# Altium PCB BIMUDB-EHDW-01.PcbDoc
Units mil, origin at the board's own origin, x right, y up, seen from the top; angles counter-clockwise.
Board outline 6000 x 4000 mil, 2 copper layers (Top Layer, Bottom Layer), stack 64.8 mil thick; 47 components, 24 nets, 132 pads, 18 vias.
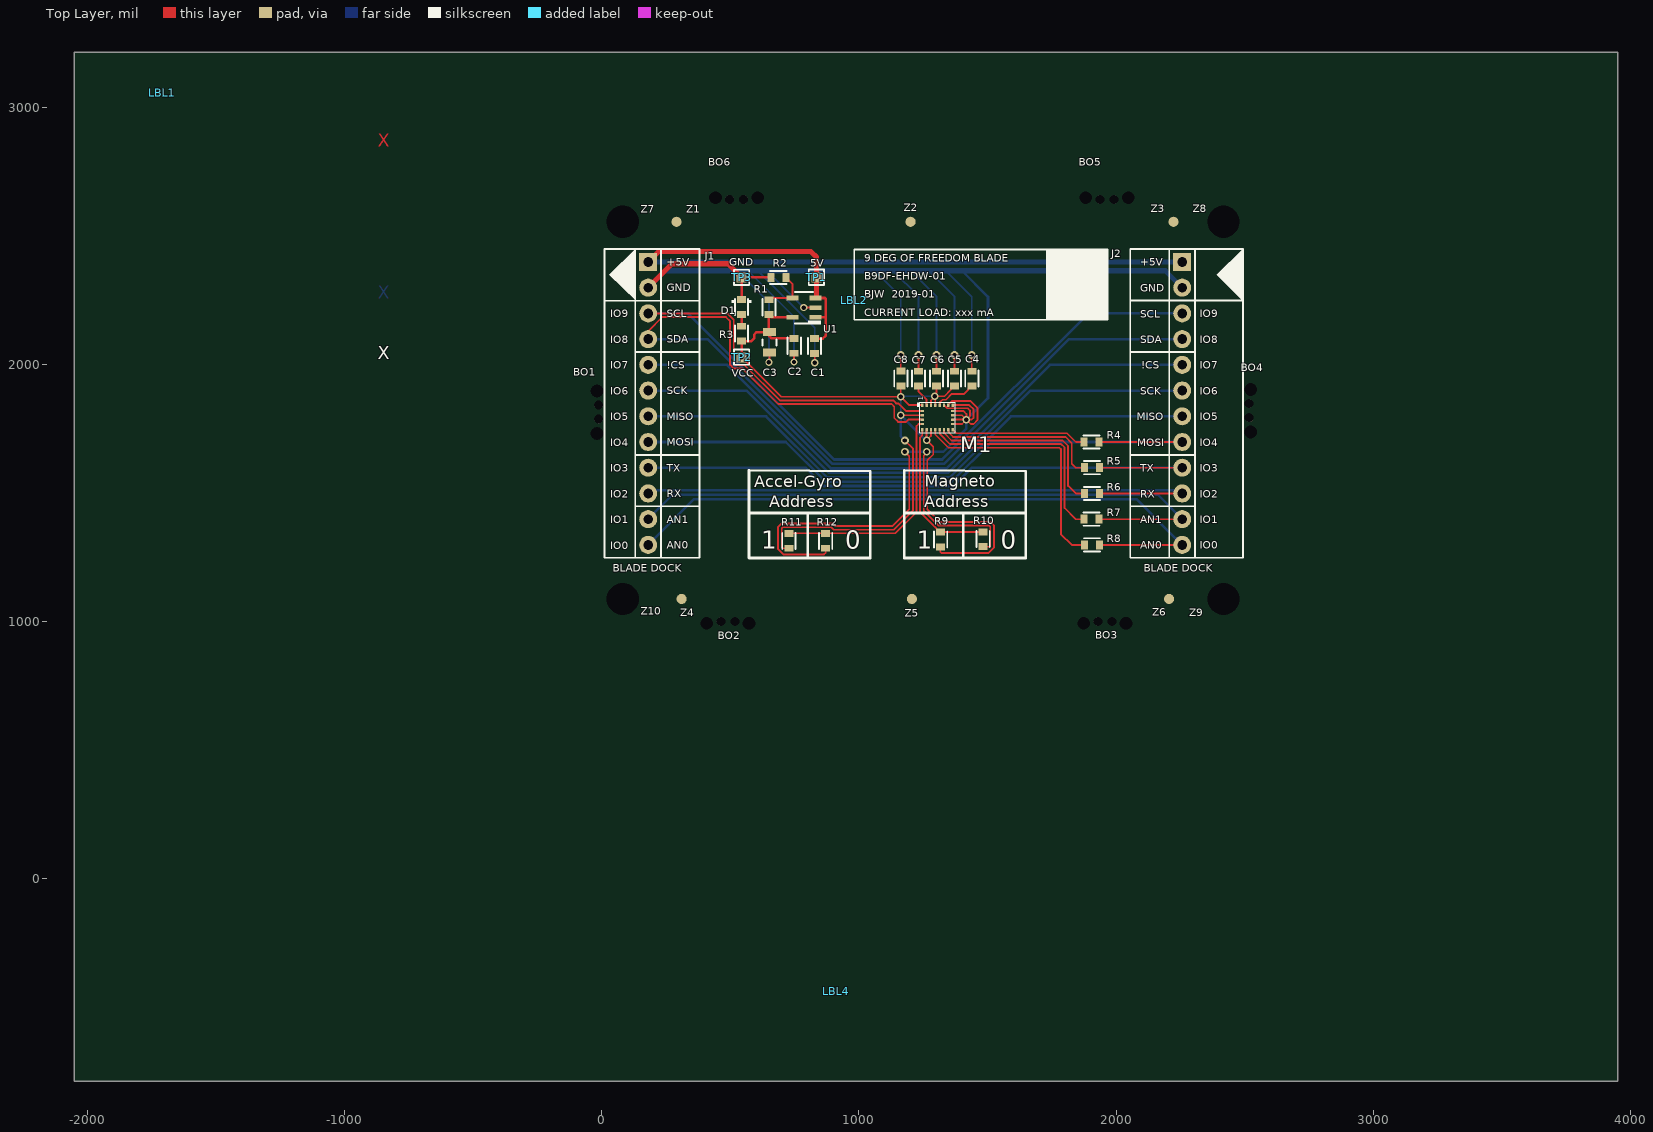
[diagram p0: Top Layer view]
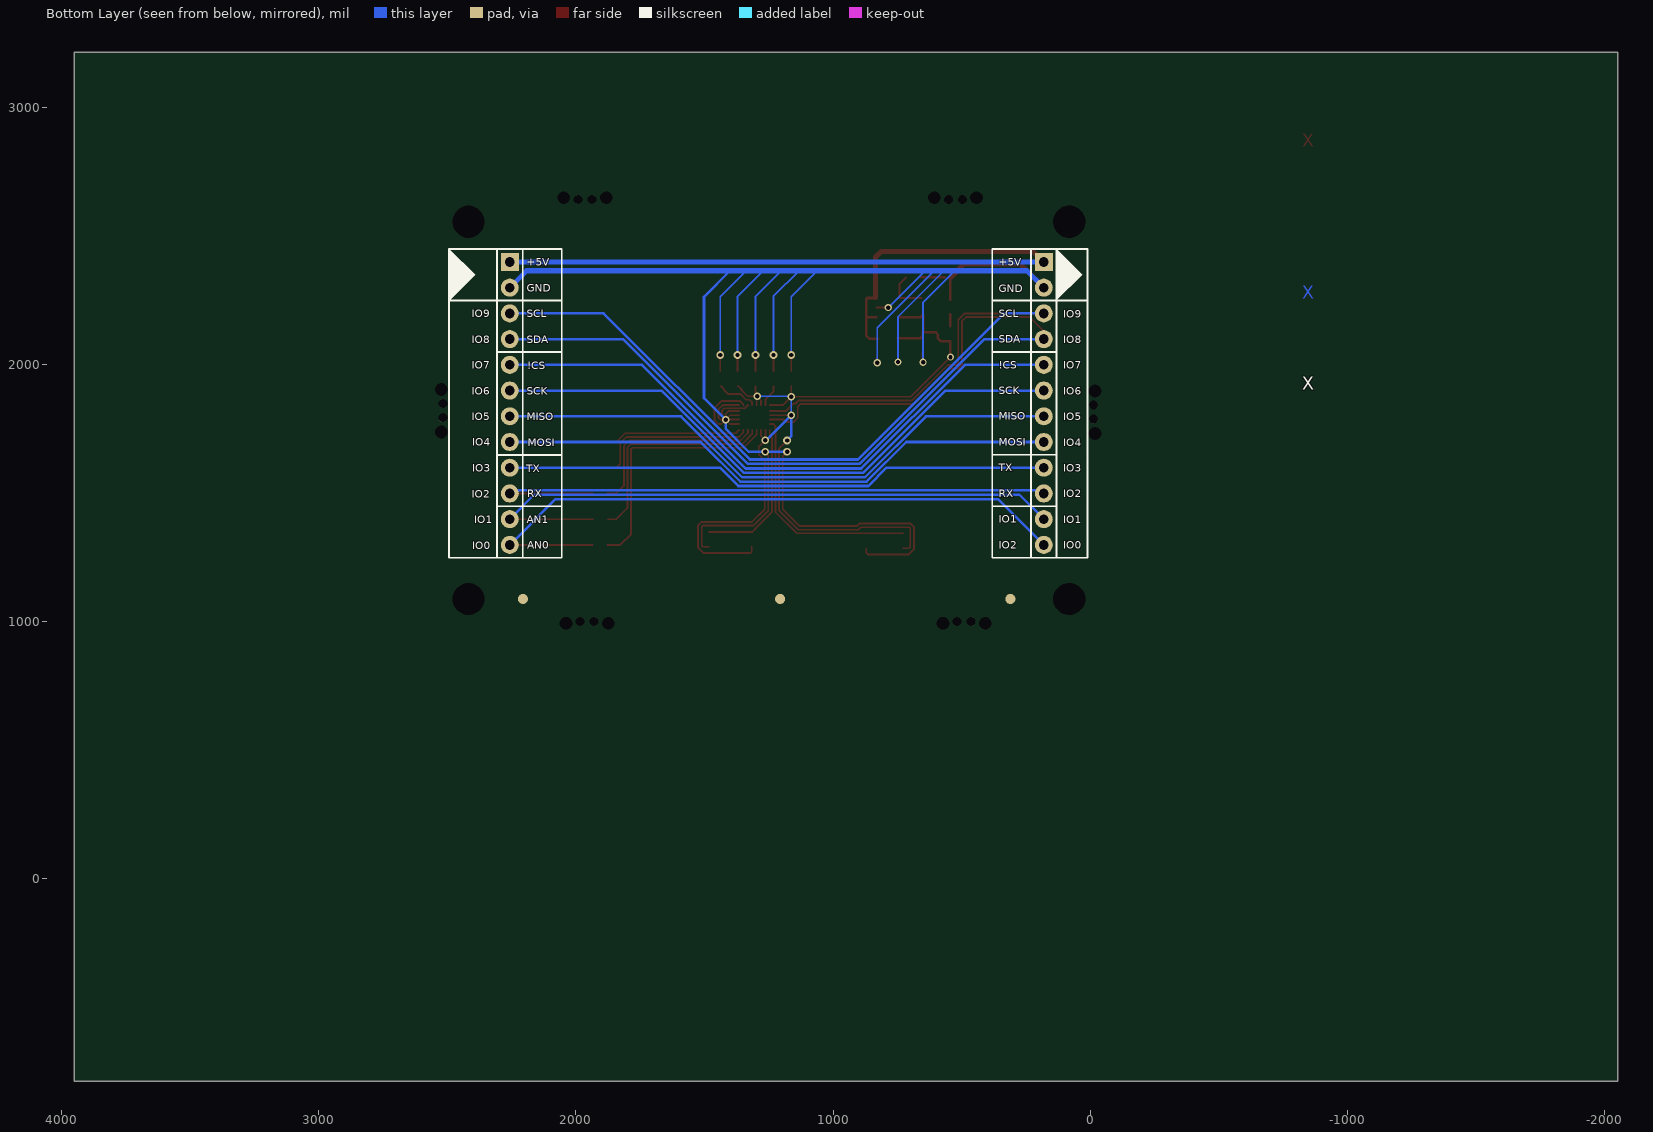
[diagram p1: Bottom Layer view, seen from below]

## Layer stack, top to bottom
Top Solder: solder mask 0.4, Solder Resist, Dk 3.5
Top Layer: signal copper 1.4
Dielectric1: core 62, FR-4, Dk 4.8
Bottom Layer: signal copper 1.4
Bottom Solder: solder mask 0.4, Solder Resist, Dk 3.5

## Board outline
-2050,-787 3950,-787 3950,3213 -2050,3213

## Design rules (kind name [scope] priority, off if disabled: settings)
Clearance "Clearance Polygon" [InPolygon] p1: gap=12 ignorepadtopadclearanceinfootprint=FALSE except(0: Arc-Hole Track-Hole SMDPad-Hole THPad-Hole Via-Hole Fill-Hole Poly-Hole Region-Hole Text-Hole)
Clearance [All] p2: gap=7 ignorepadtopadclearanceinfootprint=FALSE except(0: Arc-Hole Track-Hole SMDPad-Hole THPad-Hole Via-Hole Fill-Hole Poly-Hole Region-Hole Text-Hole)
FabricationTestPointUsage TestPointUsage [All] p1: valid=0 allowmultiple=FALSE
FabricationTestpoint Testpoint [All] p1: side=3 testpointundercomponent=TRUE minsize=40 maxsize=100 preferedsize=60 minholesize=0 maxholesize=40 preferedholesize=32 testpointgrid=1 allowsidetop=TRUE allowsidebottom=TRUE usegrid=TRUE gridtolerance=0.01
PolygonConnect "PolygonConnect Via" [All vs IsVia] p1: connectstyle=Direct reliefconductorwidth=10 reliefentries=4 polygonreliefangle="90 Angle" airgapwidth=10
PolygonConnect [All] p2: connectstyle=Relief reliefconductorwidth=10 reliefentries=4 polygonreliefangle="90 Angle" airgapwidth=10
RoomDefinition Sheet1 [InComponentClass('Sheet1')] p1: confinementstyle=ConfineIn formatcopy=TRUE lockcomponents=FALSE outline 3995,-732 6667,-732 6667,-484 3995,-484
RoomDefinition BIMUDB-EHDW-01 [InComponentClass('BIMUDB-EHDW-01')] p2: confinementstyle=ConfineIn formatcopy=TRUE lockcomponents=FALSE outline -3050,-1787 -1050,-1787 -1050,-787 -3050,-787
RoutingVias [All] p1: holewidth=28 width=50 viastyle="Through Hole" minholewidth=28 minwidth=50 maxholewidth=28 maxwidth=50
SilkToSolderMaskClearance SilkscreenOverComponentPads [IsPad] p1: minsilkscreentomaskgap=10 clearancetoexposedcopper=TRUE
SolderMaskExpansion [All] p1: expansion=4
Width [All] p1: maxlimit=200 minlimit=5 preferedwidth=10 toplayer_prefwidth=7 minimp=50.000000 maximp=50.000000 favimp=50.000000
27 further rules are at their usual default settings.

## Classes and differential pairs
component class Sheet1: C1 C2 C3 C4 C5 C6 C7 C8 D1 J1 J2 M1 R1 R2 R3 R4 R5 R6 R7 R8 R9 R10 R11 R12 TP1 TP2 TP3 U1
component class BIMUDB-EHDW-01: BO1 BO2 BO3 BO4 BO5 BO6 LBL1 LBL2 LBL4 Z1 Z2 Z3 Z4 Z5 Z6 Z7 Z8 Z9 Z10

## Components (designator, comment, footprint, x,y, rotation, side; value= is the part's Value field where it differs from the comment)
BO1 "BREAKOUT TAB" "BREAKOUT 4-HOLE 4MM" -12,1814 r270 top
BO2 "BREAKOUT TAB" "BREAKOUT 4-HOLE 4MM" 491,1000 r0 top
BO3 "BREAKOUT TAB" "BREAKOUT 4-HOLE 4MM" 1956.5,1000 r0 top
BO4 "BREAKOUT TAB" "BREAKOUT 4-HOLE 4MM" 2517,1820 r90 top
BO5 "BREAKOUT TAB" "BREAKOUT 4-HOLE 4MM" 1964.5,2641 r180 top
BO6 "BREAKOUT TAB" "BREAKOUT 4-HOLE 4MM" 524.5,2641 r180 top
C1 "1uF" 0603 827.6,2070.99 r270 top
C2 "1uF" 0603 748.6,2071.99 r270 top
C3 "10uF 0805 10V" 0805 652.21,2085.99 r270 top
C4 "10nF" 0603 1439,1944 r90 top
C5 "100nF" 0603 1372,1944 r90 top
C6 "10uF" 0603 1302,1944 r90 top
C7 "100nF" 0603 1232,1944 r90 top
C8 "100nF" 0603 1163,1945 r90 top
D1 "GREEN SMT" "0603 AK" 544,2223 r90 top
J1 "BLADE Child" "HDR1X12 ENGENUICS CHILD" 181,2398 r0 top
J2 "BLADE Parent" "HDR1X12 ENGENUICS PARENT" 2257,2398 r0 top
LBL1 "Active Layer Guide" "LABEL PCB ACTIVE LAYERS VERTICAL" -1708,3056 r0 top
LBL2 "PCB REV" "LABEL PCB REVISION BLADE" 982,2250 r0 top
LBL4 "PCB TITLE BLOCK" "LABEL PCB Title Block" 913,-438 r0 top
M1 "LSM9DS1 MCU" LSM9DS3 1305.75,1793.39 r0 top
R1 "698k" 0603 650.21,2221.99 r270 top
R2 "100k" 0603 687.06,2338 r180 top
R3 "1.2k" 0603 544,2119 r270 top
R4 "0R" 0603 1905,1698 r0 top
R5 "0R" 0603 1906,1598 r0 top
R6 "0R" 0603 1906,1498 r0 top
R7 "0R" 0603 1905,1398 r0 top
R8 "0R" 0603 1906,1298 r0 top
R9 "0R" 0603 1318,1319 r270 top
R10 "0R" 0603 1483,1320 r90 top
R11 "0R" 0603 728,1314 r90 top
R12 "0R" 0603 871,1314 r90 top
TP1 "5V" "TEST POINT SMT" 835.01,2338.4 r0 top
TP2 "VCC" "TEST POINT SMT" 544,2028 r180 top
TP3 "GND" "TEST POINT SMT" 544,2338 r180 top
U1 "MCP1824" SOT23-5 786.6,2219.99 r90 top
Z1 "PCB" "FIDUCIAL PCB" 291,2554 r0 top
Z2 "PCB" "FIDUCIAL PCB" 1201,2554 r0 top
Z3 "PCB" "FIDUCIAL PCB" 2223,2554 r0 top
Z4 "Panel" "FIDUCIAL PANEL" 311,1088 r0 top
Z5 "Panel" "FIDUCIAL PANEL" 1206,1088 r0 top
Z6 "Panel" "FIDUCIAL PANEL" 2206,1088 r0 top
Z7 "LABEL PANEL TOOL HOLE" "TOOLING HOLE 125MIL" 82,2554 r0 top
Z8 "LABEL PANEL TOOL HOLE" "TOOLING HOLE 125MIL" 2418,2554 r0 top
Z9 "LABEL PANEL TOOL HOLE" "TOOLING HOLE 125MIL" 2418,1088 r0 top
Z10 "LABEL PANEL TOOL HOLE" "TOOLING HOLE 125MIL" 82,1088 r0 top

## Footprints (in the part's own frame and the unit in brackets; to place one, negate y for a bottom-side part, rotate by r counter-clockwise, add the part's x,y. Pads: shape width x height; smd on the part's side, far side on the other; paste and mask are expansions set on the pad)
0603 [mil]
  rect 27x35 smd: 1(-29,0) 2(29,0)
  silkscreen extent -31,-26 31,26
"0603 AK" [mil]
  rect 27x35 smd: A(-29,0) K(29,0)
  silkscreen extent -31,-39 31,39
0805 [mm]
  rect 0.8x1.27 smd: 1(-0.99,-0.003) 2(1.011,-0.003)
  silkscreen extent -0.29,-0.7 0.31,0.7
"BREAKOUT 4-HOLE 4MM" [mil]
  round 32 hole 50 paste+0 mask+0: ""(-82.5,-6.5) ""(82.5,-6.5)
  round 32 hole 35 paste+0 mask+0: ""(-27.5,0) ""(27.5,0)
"FIDUCIAL PANEL" [mm]
  round 1 all layers, no hole paste-2.54: 1(0,0)
"FIDUCIAL PCB" [mm]
  round 1 smd paste-2.54 mask+0.102: 1(0,0)
"HDR1X12 ENGENUICS CHILD" [mil]
  rect 70x70 hole 38: 1(0,0)
  round 70 hole 38: 2(0,-100) 3(0,-200) 4(0,-300) 5(0,-400) 6(0,-500) 7(0,-600) 8(0,-700) 9(0,-800) 10(0,-900) 11(0,-1000) 12(0,-1100)
  silkscreen extent -170,-1150 200,51
"HDR1X12 ENGENUICS PARENT" [mil]
  rect 70x70 hole 38: 1(0,0)
  round 70 hole 38: 2(0,-100) 3(0,-200) 4(0,-300) 5(0,-400) 6(0,-500) 7(0,-600) 8(0,-700) 9(0,-800) 10(0,-900) 11(0,-1000) 12(0,-1100)
  silkscreen extent -202,-1150 236,50
"LABEL PCB ACTIVE LAYERS VERTICAL" [mil]
"LABEL PCB REVISION BLADE" [mil]
  silkscreen extent 0,-77 984,197
"LABEL PCB Title Block" [mil]
LSM9DS3 [mm]
  rect 0.23x0.35 smd: 1(-1.505,1.225) 6(-1.505,-1.225) 7(-1.075,-1.225) 8(-0.645,-1.225) 9(-0.215,-1.225) 10(0.215,-1.225) 11(0.645,-1.225) 12(1.075,-1.225) 13(1.505,-1.225) 18(1.505,1.225) 19(1.075,1.225) 20(0.645,1.225) 21(0.215,1.225) 22(-0.215,1.225) 23(-0.645,1.225) 24(-1.075,1.225)
  rect 0.35x0.23 smd: 2(-1.505,0.645) 3(-1.505,0.215) 4(-1.505,-0.215) 5(-1.505,-0.645) 14(1.505,-0.645) 15(1.505,-0.215) 16(1.505,0.215) 17(1.505,0.645)
  silkscreen extent -2.03,-1.5 1.75,1.5
SOT23-5 [mm]
  rect 0.45x1.2 smd: 1(-0.94,-1.153) 2(0.011,-1.153) 3(0.96,-1.153) 4(0.96,1.147) 5(-0.94,1.147)
  silkscreen extent -1.65,-1.68 1.56,0.9
"TEST POINT SMT" [mil]
  rect 40x40 smd: 1(0,0)
  silkscreen extent -30,-30 30,30
"TOOLING HOLE 125MIL" [mil]
  round 1 hole 125 unplated: 0(0,0)

## Part data
BO1 BO2 BO3 BO4 BO5 BO6: 2. Manufacturer=N/A, 1. Description="BREAKOUT TAB", 3. Manufacturer Part Number=N/A, 4. Digi-Key Part Number=N/A, 5. Internal Part Number=N/A, 6. Last Modified="June 18, 2008", 7. Modified By=JRL
C1 C2: library part "CAPACITOR NON-POLARIZED", 2. Manufacturer="Taiyo Yuden", 3. Manufacturer Part Number=EMK107BJ105KA-T, 4. Digi-Key Part Number=587-1251-2-ND, 5. Internal Part Number=100009, 1. Description="CAP CER 1uF 10% X5R 16V 0603 SMT", 6. Last Modified=2011-08-01, 7. Modified By=JRL
C3: library part "CAPACITOR NON-POLARIZED", 2. Manufacturer=Taiyo, 3. Manufacturer Part Number=LMK212BJ106KG-T, 4. Digi-Key Part Number=587-1300-1-ND, 5. Internal Part Number=100006, 1. Description="CAP CER 10UF 10V X5R 0805", 6. Last Modified=2010-10-11, 7. Modified By=JRL
C4 C5 C6 C7 C8: library part "CAPACITOR NON-POLARIZED", 1. Description="CAP [TYPE] [VALUE] [TOLERANCE] [VOLTAGE] [CLASS] [PACKAGE]"
D1: library part "LED T1-3/4", "LED", 2. Manufacturer=Lite-on, 3. Manufacturer Part Number=LTST-C190GKT, 4. Digi-Key Part Number=160-1183-1-ND, 5. Internal Part Number=100065, 1. Description="LED GREEN CLEAR 0603 SMD", 6. Last Modified="October 18, 2009", 7. Modified By=JRL
J1: library part "CONN ENGENUICS BLADE CHILD", 2. Manufacturer=FCI, 3. Manufacturer Part Number=68016-412HLF, 4. Digi-Key Part Number=609-3330-ND, 5. Internal Part Number=100021, 1. Description="CONN HEADER 12POS .100 R/A TIN", 6. Last Modified=2011-08-01, 7. Modified By=JRL
J2: library part "CONN ENGENUICS BLADE PARENT", 2. Manufacturer=Sullins, 3. Manufacturer Part Number=PPTC121LGBN-RC, 4. Digi-Key Part Number=S5448-ND, 5. Internal Part Number=100031, 1. Description="CONN TERMINAL 12POS 0.100\" RIGHT ANGLE", 6. Last Modified=2011-04-17, 7. Modified By=JRL
LBL1: library part "LABEL PCB ACTIVE LAYERS", 2. Manufacturer=N/A, 1. Description="LABEL PCB ACTIVE LAYERS", 3. Manufacturer Part Number=N/A, 4. Digi-Key Part Number=N/A, 5. Internal Part Number=N/A
LBL2: library part "LABEL PCB REVISION", 2. Manufacturer=N/A, 1. Description="LABEL PCB ENGENUICS", 3. Manufacturer Part Number=N/A, 4. Digi-Key Part Number=N/A, 5. Internal Part Number=N/A, 6. Last Modified="June 30, 2008", 7. Modified By=JRL
LBL4: library part "LABEL PCB TITLE BLOCK", 2. Manufacturer=N/A, 1. Description="LABEL PCB TITLE BLOCK", 3. Manufacturer Part Number=N/A, 4. Digi-Key Part Number=N/A, 5. Internal Part Number=N/A, 6. Last Modified="June 30, 2008", 7. Modified By=JRL
M1: library part LSM9DS1, Digi-Key Part Number=497-14946-1-ND, Manufacturer=STMicroelectronics, Manufacturer Part Number=LSM9DS1TR, Last Modified=2018-12-08, Modified By="Bud Wandinger"
R1: library part RESISTOR, 2. Manufacturer=Yageo, 3. Manufacturer Part Number=RC0603FR-07698KL, 4. Digi-Key Part Number=311-698KHRCT-ND, 5. Internal Part Number=100087, 1. Description="RES 698K OHM 1/10W 1% 0603 SMD", 6. Last Modified="July 4, 2010", 7. Modified By=JRL
R2: library part RESISTOR, 2. Manufacturer=Rohm, 3. Manufacturer Part Number=MCR03EZPJ104, 4. Digi-Key Part Number=RHM100KGCT-ND, 5. Internal Part Number=100078, 1. Description="RES 100K OHM 1/10W 5% 0603 SMD", 6. Last Modified=2010-10-11, 7. Modified By=JRL
R3: library part RESISTOR, 2. Manufacturer=Rohm, 3. Manufacturer Part Number=MCR03EZPJ122, 4. Digi-Key Part Number=RHM1.2KGCT-ND, 5. Internal Part Number=100076, 1. Description="RES 1.2K OHM 1/10W 5% 0603 SMD", 6. Last Modified=2010-10-11, 7. Modified By=JRL
R4 R5 R6 R7 R8 R9 R10 R11 R12: library part RESISTOR, 1. Description="RES [VALUE] [POWER] [TOLERANCE] [PACKAGE] [CONSTRUCTION]"
TP1 TP2 TP3: library part "TEST POINT SMT", 2. Manufacturer=N/A, 1. Description="Test pad", 3. Manufacturer Part Number=N/A, 4. Digi-Key Part Number=N/A, 5. Internal Part Number=N/A, 6. Last Modified="June 12, 2008", 7. Modified By=JRL
U1: library part "VREG MCP1824", 2. Manufacturer=Microchip, 3. Manufacturer Part Number=MCP1824T-ADJE/OT, 4. Digi-Key Part Number=MCP1824T-ADJE/OTCT-ND, 5. Internal Part Number=100049, 1. Description="IC LDO REG 300MA ADJ-V SOT23-5", 6. Last Modified=2011-04-17, 7. Modified By=JRL
Z1 Z2 Z3: library part "FIDUCIAL PCB", 1. Description="FIDUCIAL SINGLE LAYER PADS ONLY", 6. Last Modified=2011-04-17, 7. Modified By=JRL
Z4 Z5 Z6: library part "FIDUCIAL PANEL", 1. Description="FIDUCIAL MULTI LAYER PAD ONLY", 6. Last Modified=2011-04-17, 7. Modified By=JRL

## Via types
v1: diameter 30, hole 17, Top Layer to Bottom Layer, 13 vias
v2: diameter 28, hole 17, Top Layer to Bottom Layer, tented both sides, 5 vias

## Nets (pads, with @x,y where several pads share a name; then routed paths per layer and width w, separated by ;. In a path a pad name is that pad's centre, name@x,y a point inside that pad or via, vN(x,y) a via of type N, cw(c..) or ccw(c..) an arc to the next point about the centre after c; other vN are vias at no path point)
!CS/IO7: J1.5 J2.5 | length 2423.9
  Bottom Layer w7: J2.5 J2.5@2271,1998
  Bottom Layer w10: J1.5 487.92,1998 890.92,1595 1340,1595 1743,1998 J2.5
+5V: C1.1 J1.1 J2.1 TP1.1 U1.1 U1.3 | length 3186.1
  Top Layer w7: U1.3 U1.3@835.01,2260.81 ; 866.78,2257.8 870.6,2253.99 ; 868,2183 870.6,2180.4
  Top Layer w10: C1.1 859.6,2099.99 870.6,2110.99 870.6,2253.99 ; U1.1 868,2183 ; U1.3 866.78,2257.8
  Top Layer w20: J1.1 221,2438 814,2438 835.01,2416.99 TP1.1 U1.3@835.01,2260.81
  Bottom Layer w20: J1.1 J2.1
AN0/IO0: J1.12 J2.12 R8.2 | length 2545.5
  Top Layer w7: R8.2 J2.12
  Bottom Layer w10: J1.12 359,1476 2079,1476 J2.12
AN1/IO1: J1.11 J2.11 R7.2 | length 2477.7
  Top Layer w7: R7.2 J2.11
  Bottom Layer w10: J1.11 276,1493 2162,1493 J2.11
GND: C1.2 C2.2 C3.2 C4.2 C5.2 C6.2 C7.2 C8.2 D1.K J1.2 J2.2 M1.14 M1.15 M1.16 M1.17 M1.18 M1.19 M1.20 R2.2 R10.1 R12.1 TP3.1 U1.2 | length 10013.4
  Top Layer w7: J1.2@185.55,2298 J1.2 ; J1.2@186.75,2282.25 186.75,2292.25 J1.2 ; J1.2@187.4,2304.4 J1.2 ; v2(650.38,2007.95) 652.09,2009.66 C3.2 ; v2(747.76,2008.95) C2.2@747.76,2042.15 ; v2(786.01,2220.4) U1.2 ; v2(828.76,2005.95) C1.2@828.76,2040.82 ; R12.1 871,1268.1 863.9,1261 706.15,1261 686,1281.15 686,1368.7 698.3,1381 898.65,1381 908.65,1371 1130.4,1371 1195.93,1436.52 1195.93,1643.07 v1(1179,1660) ; C8.2 v1(1163,2036) ; C7.2 v1(1232,2036) ; v1(1263.43,1660) 1263.43,1655.9 1251.93,1644.4 1251.93,1430.87 1309.8,1373 1506.9,1373 1511,1368.9 1511,1295.1 1506.9,1291 R10.1 ; C6.2 v1(1302,2036) ; M1.20 1331.14,1839.26 1332.17,1838.23 1334.53,1838.23 1343.76,1829 1423,1829 1432,1820 1432,1798.93 v1(1418,1784.93) ; M1.19 1349.1,1842.65 1349.1,1845.1 1361,1857 1435,1857 1461,1831 1461,1783 1446,1768 1434.93,1768 v1(1418,1784.93) ; M1.14 1401.07,1768 v1(1418,1784.93) ; M1.15 v1(1418,1784.93) ; M1.16 1401.07,1801.86 v1(1418,1784.93) ; M1.17 1406.21,1818.79 1418,1807 v1(1418,1784.93) ; M1.18 1429.38,1841.62 1446,1825 1446,1793 1437.93,1784.93 v1(1418,1784.93) ; C5.2 v1(1372,2036) ; C4.2 v1(1439,2036)
  Top Layer w10: D1.K TP3.1 ; 565.63,2338 R2.2
  Top Layer w20: J1.2@187.4,2304.4 274,2391 491,2391 TP3.1
  Bottom Layer w7: 528,2364 650.38,2241.62 v2(650.38,2007.95) ; 561,2364 569,2364 747.76,2185.24 v2(747.76,2008.95) ; 604,2364 607,2364 828.76,2142.24 v2(828.76,2005.95) ; 640,2364 642.41,2364 v2(786.01,2220.4) ; 1062,2364 1163,2263 v1(1163,2036) ; 1132,2364 1232,2264 v1(1232,2036) ; 1201,2364 1302,2263 v1(1302,2036) ; 1271,2364 1372,2263 v1(1372,2036) ; 1337,2364 1439,2262 v1(1439,2036)
  Bottom Layer w10: v1(1179,1660) v1(1263.43,1660) 1328,1660 1418,1750 v1(1418,1784.93) 1502,1868.93 1502,2262 1400,2364
  Bottom Layer w20: J1.2@185.14,2302.14 247,2364 528,2364 561,2364 ; 569,2364 604,2364 ; 607,2364 640,2364 ; 642.41,2364 1062,2364 1132,2364 1201,2364 1271,2364 1337,2364 1400,2364 2191,2364 J2.2
MISO/IO5: J1.7 J2.7 | length 2272.3
  Bottom Layer w10: J1.7 639.83,1798 876.83,1561 1354.08,1561 1591.08,1798 J2.7
MOSI/IO4: J1.8 J2.8 R4.2 | length 2526.6
  Top Layer w7: R4.2 J2.8
  Bottom Layer w10: J1.8 715.79,1698 869.79,1544 1361.12,1544 1515.12,1698 J2.8
NetC4_1: C4.1 M1.21 | length 163
  Top Layer w7: M1.21 1315.24,1842.65 1315.24,1851.99 1325.25,1862 1338.8,1862 1361.8,1885 1409,1885 1425,1901 1425,1905 1435,1915 C4.1
NetC7_1: C7.1 M1.24 | length 86.4
  Top Layer w7: C7.1 1232,1894 1263.43,1862.57 M1.24
NetD1_A: D1.A R3.1 | length 46
  Top Layer w10: R3.1 D1.A
NetM1_5: M1.5 R11.2 R12.2 | length 890.8
  Top Layer w7: R11.2 R12.2 1142,1343 1223.93,1424.93 1223.93,1759.93 1232,1768 M1.5
NetM1_6: M1.6 R9.1 R10.2 | length 601.6
  Top Layer w7: M1.6 1246.5,1724.13 1237.93,1715.56 1237.93,1425.07 1304,1359 1304,1358 1314,1348 R9.1 1482,1348 R10.2
NetM1_9: M1.9 R8.1 | length 969
  Top Layer w7: M1.9 1297.28,1727.22 1348.5,1676 1780,1676 1785.6,1670.4 1785.6,1340 1827.6,1298 R8.1
NetM1_10: M1.10 R7.1 | length 852.2
  Top Layer w7: M1.10 1314.21,1730.09 1354.3,1690 1786.2,1690 1799.6,1676.6 1799.6,1441.4 1843,1398 R7.1
NetM1_11: M1.11 R6.1 | length 746.4
  Top Layer w7: M1.11@1331,1745.02 M1.11 1331.17,1732.93 1360.1,1704 1792,1704 1813.6,1682.4 1813.6,1527.4 1843,1498 R6.1
NetM1_12: M1.12 R5.1 | length 642.3
  Top Layer w7: M1.12 1349.1,1744.14 1349.1,1734.8 1365.9,1718 1803.2,1718 1827.6,1693.6 1827.6,1613.4 1843,1598 R5.1
NetM1_13: M1.13 R4.1 | length 530.5
  Top Layer w7: M1.13 1378.17,1732 1809,1732 1843,1698 R4.1
NetR1_1: R1.1 R2.1 U1.4 | length 175.1
  Top Layer w7: R1.1@657.03,2257.8 716.06,2257.8 U1.4 741.45,2312.62 R2.1
SCK/IO6: J1.6 J2.6 | length 2341.1
  Bottom Layer w10: J1.6 563.88,1898 883.88,1578 1347.04,1578 1667.04,1898 J2.6
SCL/IO9: J1.3 J2.3 M1.2 | length 3868.5
  Top Layer w7: J1.3 488.8,2198 513.5,2173.3 513.5,2003.65 519.65,1997.5 554.7,1997.5 692.48,1859.72 1133.08,1859.72 1144.58,1848.22 1152.7,1848.22 1182.13,1818.79 M1.2
  Bottom Layer w10: J1.3 336,2198 904,1630 1324,1630 1892,2198 J2.3
SDA/IO8: J1.4 J2.4 M1.4 | length 3894.9
  Top Layer w7: J1.4 181,2129.3 235.7,2184 483,2184 499.5,2167.5 499.5,1997.85 513.85,1983.5 548.9,1983.5 686.69,1845.72 1127.28,1845.72 1137.5,1835.5 1137.5,1791.3 1152.44,1776.36 1183.7,1776.36 1192.27,1784.93 M1.4
  Bottom Layer w10: J1.4 411.96,2098 896.96,1613 1331.04,1613 1816.04,2098 J2.4
URX/IO2: J1.10 J2.10 R6.2 | length 2407.9
  Top Layer w7: R6.2 J2.10
  Bottom Layer w10: J1.10 193,1510 2221.14,1510 2221.66,1509.48 2245.52,1509.48 J2.10
UTX/IO3: J1.9 J2.9 R5.2 | length 2456.8
  Top Layer w7: R5.2 J2.9
  Bottom Layer w10: J1.9 791.75,1598 862.75,1527 1368.17,1527 1439.17,1598 J2.9
VCC: C2.1 C3.1 C5.1 C6.1 C8.1 M1.1 M1.3 M1.7 M1.8 M1.22 M1.23 R1.2 R3.2 R9.2 R11.1 TP2.1 U1.5 | length 3990.8
  Top Layer w7: v2(544,2028) 698.28,1873.72 v1(1163,1873.72) ; C3.1@652.09,2110.11 C3.1 ; R11.1 705.1,1285 700,1290.1 700,1362.9 704.1,1367 892.85,1367 902.85,1357 1136.2,1357 1209.93,1430.72 1209.93,1673.07 v1(1179,1704) ; v1(1163,1801.86) M1.3 ; C8.1 v1(1163,1873.72) ; M1.1 1195.09,1841.62 v1(1163,1873.72) ; M1.7 v1(1263.43,1705) ; M1.8 1280.35,1721.93 v1(1263.43,1705) ; M1.23 1280.35,1860.4 1295,1875.05 v1(1295,1876) ; M1.22@1298,1842.34 M1.22 1297.28,1873.72 v1(1295,1876) ; C6.1 1302,1889.22 1295,1882.22 v1(1295,1876) ; R9.2 1316.1,1288.1 1316.1,1271.1 1320.2,1267 1504.85,1267 1525,1287.15 1525,1374.7 1512.7,1387 1315.6,1387 1265.93,1436.67 1265.93,1626.44 1288.93,1649.44 1288.93,1670.32 1289,1670.4 1289,1679.43 v1(1263.43,1705) ; C5.1 1368,1915 1358,1905 1358,1901 1333,1876 v1(1295,1876)
  Top Layer w10: 544,2055.22 v2(544,2028) R3.2 582,2090 593,2101 593,2115 602.95,2124.95 C3.1 650.21,2126.82 R1.2 660.2,2183 U1.5 ; C3.1@652.09,2110.11 661.21,2100.99 C2.1
  Bottom Layer w7: v1(1163,1801.86) v1(1163,1873.72) ; v1@1165.28,1876 v1(1295,1876)
  Bottom Layer w10: v1(1163,1873.72) v1@1165.28,1876 ; v1(1179,1704) 1163,1720 v1(1163,1801.86) 1259.86,1705 v1(1263.43,1705)
pads on no net: BO1. BO2. BO3. BO4. BO5. BO6. Z1.1 Z2.1 Z3.1 Z4.1 Z5.1 Z6.1 Z7.0 Z8.0 Z9.0 Z10.0

## Other copper
Top Layer:
  pour cut-out: 855.1,2123.49 856.01,2055.4 800.01,2055.4 800.1,2123.49
  pour cut-out: 750.71,2124.49 750.63,2111.4 750.71,2047.99 617.09,2051.21 617.09,2109.65 695.71,2124.49
  pour cut-out: 739.56,2365.5 739.56,2310.5 634.56,2310.5 634.56,2365.5
  pour cut-out: 622.71,2274.49 622.71,2169.49 617.09,2150.69 687.09,2150.69 687.63,2274.4

## Silkscreen, mask and mechanical layers (free items; w line width, h text height)
Top Overlay:
  lines w10: 802,1247 802,1422 ; 1406,1247 1406,1422 ; 573,1422 573,1247 1014,1247 1045,1247 1045,1422 ; 573,1422 1045,1422 ; 573,1422 573,1588 1045,1585 1045,1422 ; 1177,1422 1177,1588 1649,1585 1649,1422 ; 1177,1422 1649,1422 ; 1177,1422 1177,1247 1618,1247 1649,1247 1649,1422
  text "Magneto" at 1257,1525 h45
  text "Accel-Gyro" at 593,1522 h45
  text "Address" at 651,1445 h45
  text "Address" at 1255,1445 h45
  text "1" at 621,1284 h70
  text "1" at 1225,1284 h70
  text "0" at 948,1283 h70
  text "0" at 1552,1283 h70
  text "BLADE DOCK" at 43,1194 h30
Mechanical 1:
  lines w7: -12,1000 -12,2641 2517,2641 2517,1000 -12,1000
Mechanical 2:
  text "9 DEG OF FREEDOM BLADE BOARD" at 791,-223 h40
  text "B9DF-EHDW" at 791,-340 h40
  text "01" at 791,-458 h40
  text "2019-01-01" at 791,-577 h40
  text "BJW" at 791,-695 h40

## Text inside footprints (layer, text, board x,y; h text height)
J1: Top Overlay "IO9" at 33,2182.25 h30; Top Overlay "IO8" at 33,2082.25 h30; Top Overlay "IO7" at 33,1982.25 h30; Top Overlay "IO6" at 33,1882.25 h30; Top Overlay "IO5" at 33,1782.25 h30; Top Overlay "IO4" at 33,1682 h30; Top Overlay "IO3" at 33,1582 h30; Top Overlay "IO2" at 33,1482 h30; Top Overlay "IO1" at 33,1382 h30; Top Overlay "IO0" at 33,1282 h30; Top Overlay "MISO" at 253,1783 h30; Top Overlay "MOSI" at 253,1684 h30; Top Overlay "SDA" at 253,2083 h30; Top Overlay "SCL" at 253,2183 h30; Top Overlay "+5V" at 253,2383.24 h30; Top Overlay "GND" at 253,2284 h30; Top Overlay "SCK" at 253,1883 h30; Top Overlay "AN0" at 253,1284 h30; Top Overlay "AN1" at 253,1383 h30; Top Overlay "!CS" at 253,1983 h30; Top Overlay "RX" at 253,1483 h30; Top Overlay "TX" at 253,1583 h30; Bottom Overlay "TX" at 357,1583.43 h30; Bottom Overlay "RX" at 357,1483.43 h30; Bottom Overlay "!CS" at 357,1983.43 h30; Bottom Overlay "IO1" at 357,1383.43 h30; Bottom Overlay "IO2" at 357,1283.43 h30; Bottom Overlay "SCK" at 357,1883.43 h30; Bottom Overlay "GND" at 357,2281 h30; Bottom Overlay "+5V" at 357,2383.43 h30; Bottom Overlay "SCL" at 357,2183.43 h30; Bottom Overlay "SDA" at 357,2083.43 h30; Bottom Overlay "MOSI" at 357,1684 h30; Bottom Overlay "MISO" at 357,1785 h30; Bottom Overlay "IO0" at 105,1282.45 h30; Bottom Overlay "IO1" at 105,1382.45 h30; Bottom Overlay "IO2" at 105,1482.45 h30; Bottom Overlay "IO3" at 105,1582.45 h30; Bottom Overlay "IO4" at 105,1682.45 h30; Bottom Overlay "IO5" at 105,1782.45 h30; Bottom Overlay "IO6" at 105,1882.45 h30; Bottom Overlay "IO7" at 105,1982.45 h30; Bottom Overlay "IO8" at 105,2082.45 h30; Bottom Overlay "IO9" at 105,2182 h30
J2: Top Overlay "BLADE DOCK" at 2108,1194 h30; Top Overlay "AN0" at 2093,1282.25 h30; Top Overlay "AN1" at 2093,1382.25 h30; Top Overlay "RX" at 2093,1482.25 h30; Top Overlay "TX" at 2093,1582.25 h30; Top Overlay "MOSI" at 2082,1682 h30; Top Overlay "MISO" at 2080,1782 h30; Top Overlay "SCK" at 2093,1882.25 h30; Top Overlay "!CS" at 2098,1982 h30; Top Overlay "SDA" at 2093,2082.25 h30; Top Overlay "SCL" at 2093,2182 h30; Top Overlay "GND" at 2093,2282.25 h30; Top Overlay "+5V" at 2093,2382.25 h30; Top Overlay "IO0" at 2324.39,1282.25 h30; Top Overlay "IO1" at 2324.39,1382.25 h30; Top Overlay "IO2" at 2324.39,1482.25 h30; Top Overlay "IO3" at 2324.39,1582.25 h30; Top Overlay "IO4" at 2324.39,1682.25 h30; Top Overlay "IO5" at 2324.39,1782.25 h30; Top Overlay "IO6" at 2324.39,1882.25 h30; Top Overlay "IO7" at 2324.39,1982.25 h30; Top Overlay "IO8" at 2324.39,2082.25 h30; Top Overlay "IO9" at 2324.39,2182.25 h30; Bottom Overlay "IO9" at 2404.12,2182.25 h30; Bottom Overlay "IO8" at 2404.12,2082.25 h30; Bottom Overlay "IO7" at 2404.12,1982.25 h30; Bottom Overlay "IO6" at 2404.12,1882.25 h30; Bottom Overlay "IO5" at 2404.12,1782.25 h30; Bottom Overlay "IO4" at 2403.65,1683.43 h30; Bottom Overlay "IO3" at 2403.65,1582.06 h30; Bottom Overlay "IO2" at 2404.12,1482.25 h30; Bottom Overlay "IO1" at 2394.8,1382.25 h30; Bottom Overlay "IO0" at 2403.65,1281.86 h30; Bottom Overlay "+5V" at 2190.46,2382.25 h30; Bottom Overlay "GND" at 2190.46,2282.25 h30; Bottom Overlay "SCL" at 2190.46,2182.25 h30; Bottom Overlay "SDA" at 2190.46,2082.25 h30; Bottom Overlay "!CS" at 2190.07,1981.66 h30; Bottom Overlay "SCK" at 2190.46,1882.25 h30; Bottom Overlay "MISO" at 2191.06,1782.25 h30; Bottom Overlay "MOSI" at 2187.12,1682.45 h30; Bottom Overlay "TX" at 2192.89,1581.27 h30; Bottom Overlay "RX" at 2190.07,1482.65 h30; Bottom Overlay "AN1" at 2191.06,1382.25 h30; Bottom Overlay "AN0" at 2190.07,1282.84 h30
LBL1: Top Layer "X" at -871.19,2846.45 h50; Bottom Layer "X" at -871.19,2255.86 h50; Top Overlay "X" at -871.19,2019.63 h50; Bottom Overlay "X" at -871.19,1901.51 h50; Top Paste "X" at -871.19,1783.39 h50; Bottom Paste "X" at -871.19,1665.28 h50; Top Solder "X" at -871.19,1547.16 h50; Bottom Solder "X" at -871.19,1429.04 h50; Keep-Out Layer "X" at -871.19,602.22 h50; Mechanical 1 "X" at -871.19,1310.92 h50; Mechanical 2 "Mechanical6" at -1661.19,722.72 h50; Mechanical 2 "Mechanical5" at -1661.19,840.83 h50; Mechanical 2 "Midlayer3" at -1661.19,2499.38 h50; Mechanical 2 "MidLayer4" at -1661.19,2381.27 h50; Mechanical 2 "MidLayer1" at -1661.19,2735.6 h50; Mechanical 2 "MidLayer2" at -1661.19,2617.49 h50; Mechanical 2 "Top Layer" at -1661.19,2853.71 h50; Mechanical 2 "Active PCB Layers" at -1661.82,2971.82 h50; Mechanical 2 "Bottom Layer" at -1661.19,2263.16 h50; Mechanical 2 "Mechanical2" at -1661.19,1195.94 h50; Mechanical 2 "Mechanical1" at -1661.19,1314.05 h50; Mechanical 2 "Mechanical3" at -1661.19,1077.83 h50; Mechanical 2 "Mechanical4" at -1661.19,959.72 h50; Mechanical 2 "Top Overlay" at -1661.19,2023.61 h50; Mechanical 2 "Top Paste" at -1661.19,1787.39 h50; Mechanical 2 "Bottom Overlay" at -1661.19,1905.5 h50; Mechanical 2 "Bottom Paste" at -1661.19,1669.28 h50; Mechanical 2 "Top Solder" at -1661.19,1551.16 h50; Mechanical 2 "Bottom Solder" at -1661.19,1433.05 h50; Mechanical 2 "Multi-layer" at -1661.19,2135.83 h50; Mechanical 2 "Keep-Out Layer" at -1661.19,603.94 h50; Mechanical 2 "X" at -871.19,1192.81 h50; Mechanical 3 "X" at -871.19,1074.69 h50; Mechanical 4 "X" at -871.19,956.57 h50; Mechanical 5 "X" at -871.19,838.45 h50; Mechanical 6 "X" at -871.19,720.33 h50; Multi-Layer "X" at -871.19,2137.75 h50
LBL2: Top Overlay "B9DF-EHDW-01" at 1021.37,2328.74 h30; Top Overlay "9 DEG OF FREEDOM BLADE" at 1021.37,2399.61 h30; Top Overlay "BJW  2019-01" at 1021.37,2257.87 h30; Top Overlay "CURRENT LOAD: xxx mA" at 1021.37,2187.01 h30
LBL4: Mechanical 2 "Title:" at 322.45,-221.46 h50; Mechanical 2 "Number:" at 322.45,-339.57 h50; Mechanical 2 "Date:" at 322.45,-575.8 h50; Mechanical 2 "Revision:" at 322.45,-457.68 h50; Mechanical 2 "Author:" at 322.45,-693.91 h50
M1: Top Overlay "1" at 1250.75,1858.39 h19.68 r90